# Altium PCB LUMOS.PcbDoc
Units mm, origin at the board's own origin, x right, y up, seen from the top; angles counter-clockwise.
Board outline 88.34 x 68.79 mm, 2 copper layers (Top Layer, Bottom Layer); 52 components, 60 nets, 204 pads, 27 vias.
Unrouted connection lines stored in the file: 2.
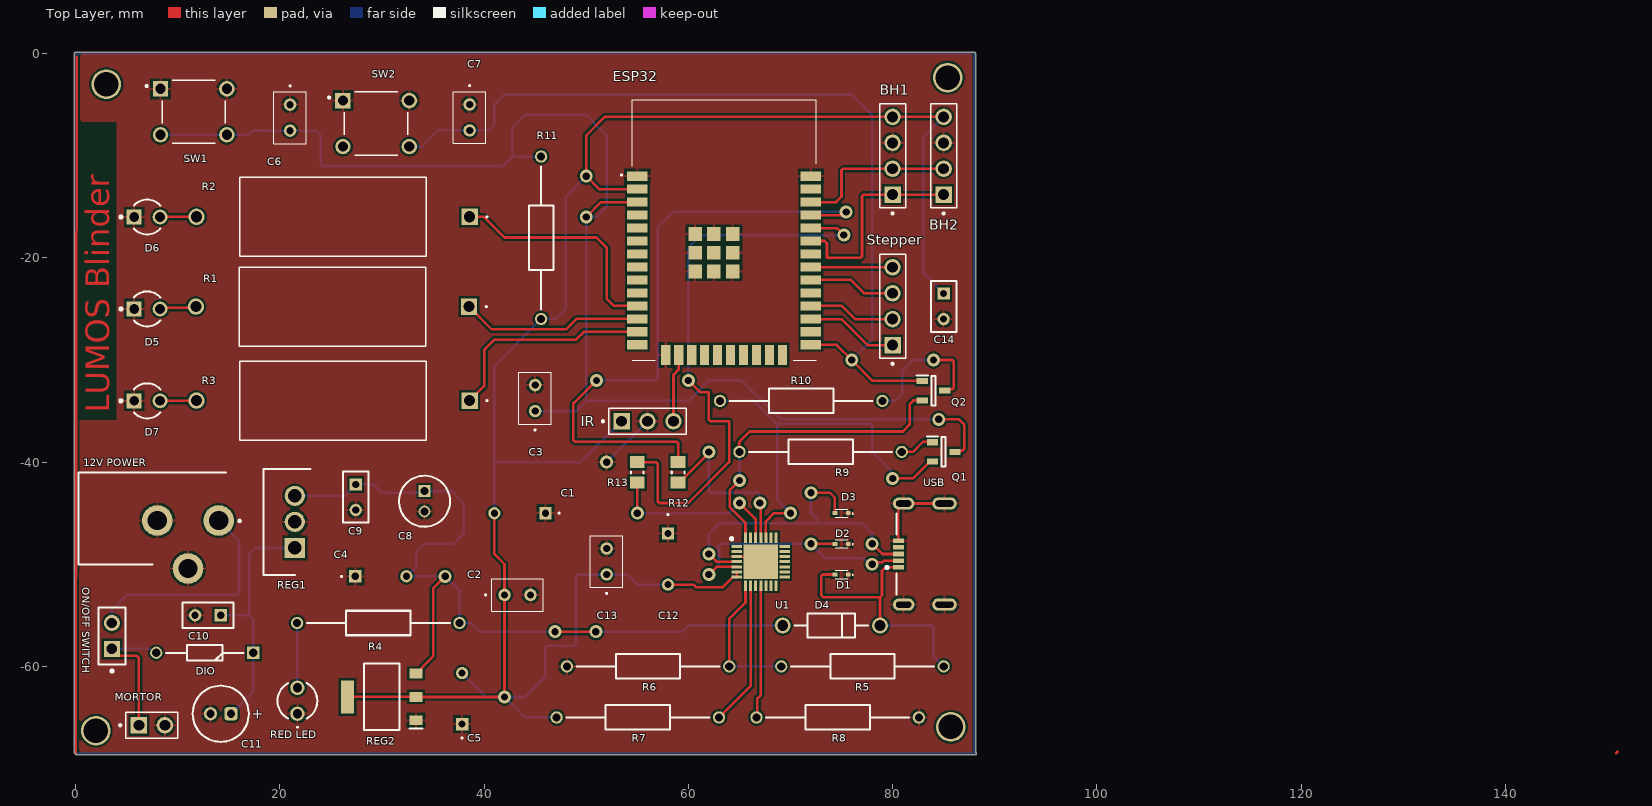
[diagram p0: Top Layer view]
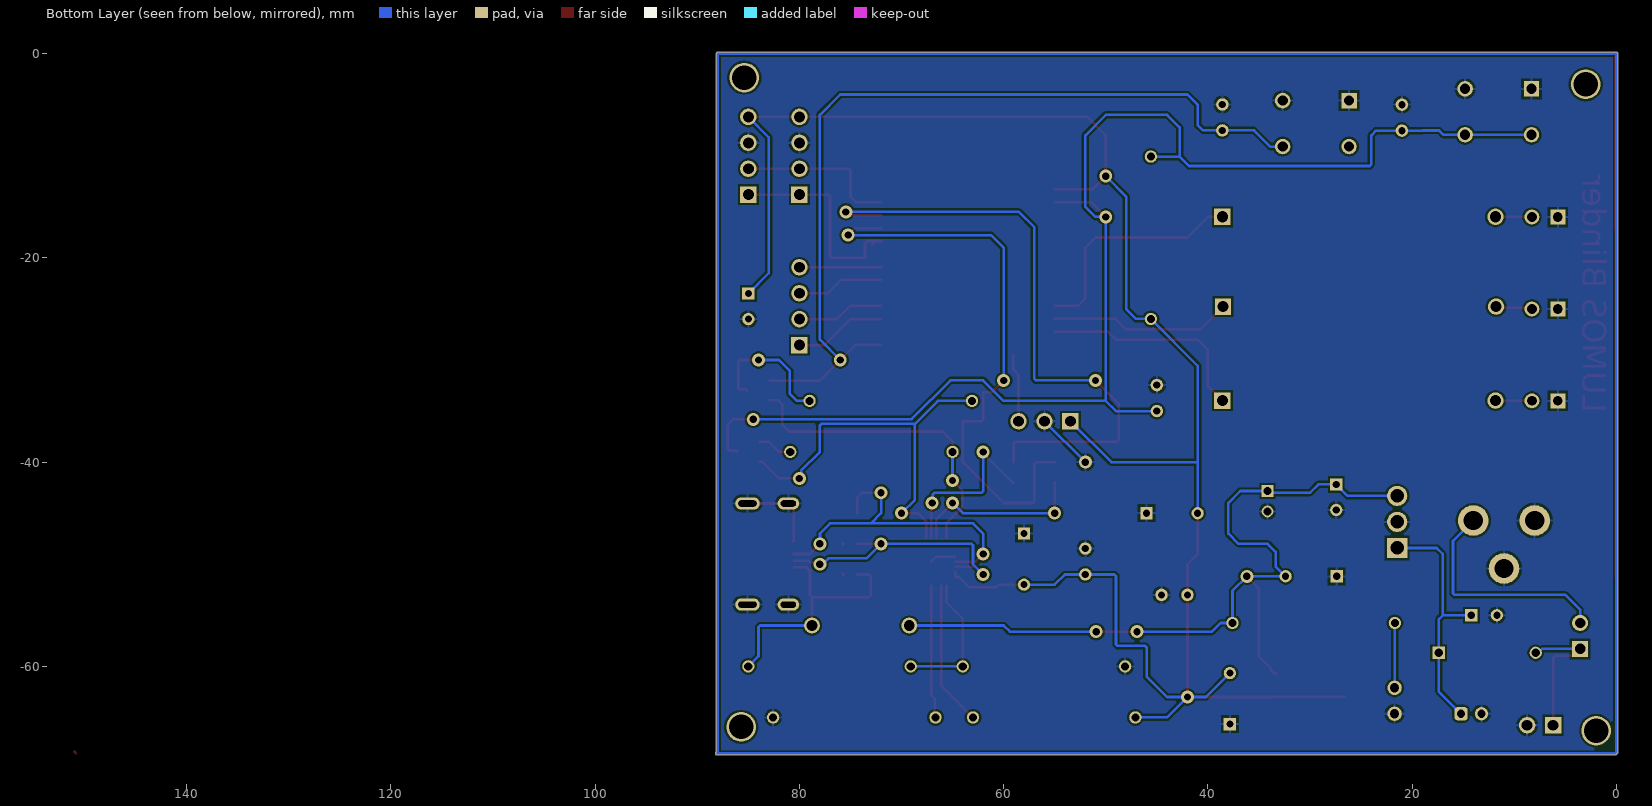
[diagram p1: Bottom Layer view, seen from below]
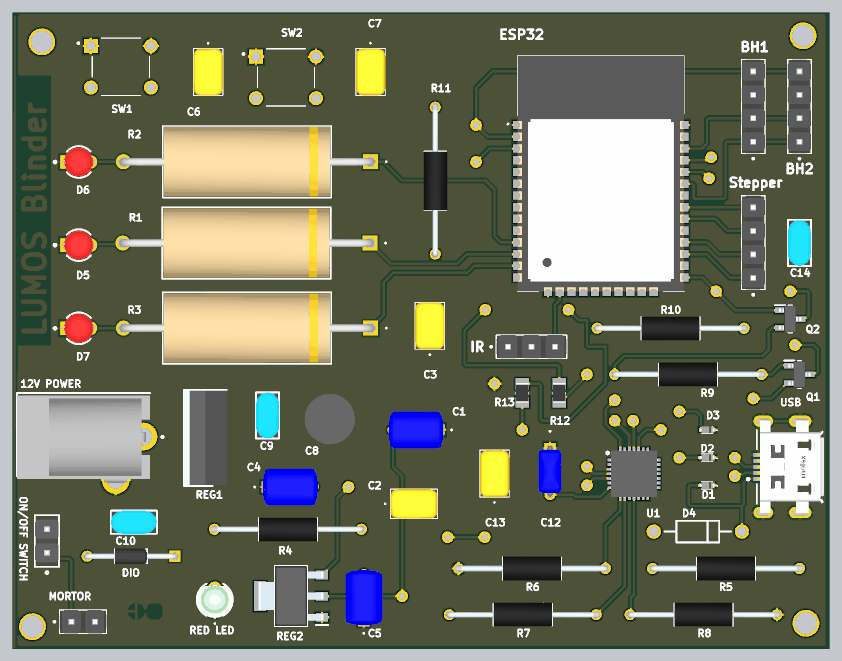
[diagram p2: 3D render of the assembled board from above, using the file's embedded part models]

## Layer stack, top to bottom
Top Solder: solder mask 0.0102, Solder Resist, Dk 3.5
Top Layer: signal copper 0.0356
Dielectric 1: dielectric 0.32, FR-4, Dk 4.8
Bottom Layer: signal copper 0.0356
Bottom Solder: solder mask 0.0102, Solder Resist, Dk 3.5

## Board outline
-0.022,-68.559 cw(c0,-68.433) -0.127,-68.433 -0.127,0 cw(c0,0) 0,0.127 88,0.127 cw(c88,0) 88.127,0 88.127,-68.416 cw(c88.084,-68.536) 88.211,-68.536 cw(c88.084,-68.536) 88.084,-68.664 0.103,-68.664 cw(c0.103,-68.536)

## Design rules (kind name [scope] priority, off if disabled: settings)
Clearance [All] p1: gap=0.203 ignorepadtopadclearanceinfootprint=TRUE
PolygonConnect [All] p1: connectstyle=Relief reliefconductorwidth=0.254 reliefentries=4 polygonreliefangle="90 Angle" airgapwidth=0.254
RoutingVias [All] p1: holewidth=0.711 width=1.27 viastyle="Through Hole" minholewidth=0.711 minwidth=1.27 maxholewidth=0.711 maxwidth=1.27
SolderMaskExpansion [All] p1: expansion=0.102 istentingtop=FALSE
SupplyNets "Schematic Supply Nets_3" [InNet('GND')] p1: voltage=0.000
SupplyNets "Schematic Supply Nets_2" [InNet('EXT_5V')] p2: voltage=0.000
SupplyNets "Schematic Supply Nets_1" [InNet('VDD33')] p3: voltage=0.000
SupplyNets "Schematic Supply Nets" [InNet('VBUS')] p4: voltage=0.000
Width [All] p1: maxlimit=0.254 minlimit=0.254 preferedwidth=0.254
30 further rules are at their usual default settings.

## Components (designator, comment, footprint, x,y, rotation, side; value= is the part's Value field where it differs from the comment)
"12V POWER" "JACK" PJ-102AH 11.001,-50.02 r90 top
BH1 "M20-9990446" HARWIN_M20-9990446 80,-10 r90 top
BH2 "M20-9990446" HARWIN_M20-9990446 85,-10 r90 top
C1 "22uF/10V(20%)" FK20 46,-45 r180 top
C2 "0.1uF/50V(10%)" C320C104K5R5TA 42,-53 r0 top
C3 "0.1uF/50V(10%)" C320C104K5R5TA 45,-35 r90 top
C4 "22uF/10V(20%)" FK20 27.385,-51.181 r0 top
C5 "22uF/10V(20%)" FK20 37.846,-65.659 r90 top
C6 "0.1uF/50V(10%)" C320C104K5R5TA 21,-5 r270 top
C7 "0.1uF/50V(10%)" C320C104K5R5TA 38.583,-4.98 r270 top
C8 "10uF" CAPPRD200W55D500H1250 34.163,-42.831 r270 top
C9 "0.1uF" FP-RDE0P1-MFG 27.432,-43.434 r270 top value=100nF
C10 "0.1uF" FP-RDE0P1-MFG 12.954,-54.991 r180 top value=100nF
C11 "0.22uF" WCAP-ATG8_D5H11 1284.208,1205.357 r0 top value=220nF
C12 "10uF/10v(20%)" FK24 58,-47 r270 top
C13 "0.1uF/50V(10%)" C320C104K5R5TA 52,-51 r90 top
C14 "0.1uF" FP-RDE0P1-MFG 85,-24.75 r270 top value=100nF
D1 "LESD5D5.0CT1G" LESD5D50CT1G 75,-51 r180 top
D2 "LESD5D5.0CT1G" LESD5D50CT1G 75,-48 r180 top
D3 "LESD5D5.0CT1G" LESD5D50CT1G 75,-45 r180 top
D4 "1N5819" ONSC-AXIAL_LEAD-2-59-10_P 74,-56 r180 top
D5 "Power LED" FP-HLMP-1301-MFG 7,-25 r0 top
D6 "Sleep Mode" FP-HLMP-1301-MFG 7,-16 r0 top
D7 "sensoring" FP-HLMP-1301-MFG 7,-34 r0 top
DIO "SD103A-TR" DIOAD950W60L350D150 17.399,-58.674 r180 top
ESP32 "ESP32-WROOM-32__16MB_" ESP32WROOM3216MB 63.5,-17.26 r0 top (schematic designator IC)
IR "M20-9990346" HARWIN_M20-9990346 56,-36 r0 top
MORTOR "M20-9990246" HARWIN_M20-9990246 7.465,-65.766 r0 top (schematic designator "MORTOR POWER")
"ON/OFF SWITCH" "M20-9990246" FP-M20-9990246-MFG 3.556,-57.023 r90 top
Q1 "SS8050-G" SOT95P240X115-3N 85,-39 r0 top
Q2 "SS8050-G" SOT95P240X115-3N 84,-33 r0 top
R1 "330ohm" RES_AC05_VIS 38.521,-24.775 r180 top value=330Ω
R2 "330ohm" RES_AC05_VIS 38.583,-15.98 r180 top value=330Ω
R3 "330ohm" RES_AC05_VIS 38.583,-33.98 r180 top value=330Ω
R4 "2k(5%)" RESAD1590W60L630D240 21.692,-55.753 r0 top
R5 "22.1K(1%)" RESAD1590W60L630D240 85,-60 r180 top
R6 "47.5K(1%)" RESAD1590W60L630D240 48.1,-60 r0 top
R7 "2k(5%)" RESAD1590W60L630D240 63,-65 r180 top
R8 "10k(5%)(NC)" RESAD1590W60L630D240 82.572,-65 r180 top
R9 "10k(5%)" RESAD1590W60L630D240 80.9,-39 r180 top
R10 "10k(5%)" RESAD1590W60L630D240 79,-34 r180 top
R11 "10k(5%)" RESAD1590W60L630D240 45.583,-10.08 r270 top
R12 "0r(5%)" RESC2013X60X35ML10T20 59,-41 r270 top value=0mOhm
R13 "0r(5%)" RESC2013X60X35ML10T20 55,-41 r270 top value=0mOhm
"RED LED" "151031SS06000" 151034GS03000 21.717,-63.373 r90 top
REG1 "L7805CV" TO255P460X1020X2008-3P 21.463,-48.407 r90 top
REG2 "AMS1117-3.3" SOT229P700X180-4N 29.972,-62.992 r180 top
Stepper "M20-9990446" HARWIN_M20-9990446 80,-24.73 r90 top
SW1 "222ADVBA" SW_222ADVBA 11.559,-5.696 r0 top
SW2 "222ADVBA" SW_222ADVBA 29.425,-6.85 r0 top
U1 "CP2102N-A02-GQFN28" QFN50P500X500X80-29N-D 67.091,-49.75 r0 top
USB "47642-0001" FP-47642-0001-MFG 84,-49 r90 top

## Footprints (in the part's own frame and the unit in brackets; to place one, negate y for a bottom-side part, rotate by r counter-clockwise, add the part's x,y. Pads: shape width x height; smd on the part's side, far side on the other; paste and mask are expansions set on the pad)
151034GS03000 [mm]
  round 1.41 hole 0.91: 1(-1.27,0) 2(1.27,0)
  silkscreen extent -2.63,-1.95 1.73,1.95, body extent -1.96,-1.97 1.65,1.98, height 11.14
C320C104K5R5TA [mm]
  round 1.217 hole 0.71: 1(0,0) 2(2.54,0)
  silkscreen extent -1.9,-1.59 3.81,1.59, body extent -1.27,-1.6 3.81,1.59, height 7.36
CAPPRD200W55D500H1250 [mm]
  rect 1.15x1.15 hole 0.75: 1(0,0)
  round 1.15 hole 0.75: 2(2,0)
  silkscreen extent -1.5,-2.5 3.5,2.5, body extent -1.74,-2.75 3.75,2.75, height 12.5
DIOAD950W60L350D150 [mm]
  rect 1.2x1.2 hole 0.8: 1(0,0)
  round 1.2 hole 0.8: 2(9.5,0)
  silkscreen extent 0.95,-0.75 8.55,0.75, body extent -0.3,-0.84 9.8,0.84, height 1.7
ESP32WROOM3216MB [mm]
  rect 2x0.9 smd: 1(-8.5,5.26) 2(-8.5,3.99) 3(-8.5,2.72) 4(-8.5,1.45) 5(-8.5,0.18) 6(-8.5,-1.09) 7(-8.5,-2.36) 8(-8.5,-3.63) 9(-8.5,-4.9) 10(-8.5,-6.17) 11(-8.5,-7.44) 12(-8.5,-8.71) 13(-8.5,-9.98) 14(-8.5,-11.25) 25(8.5,-11.25) 26(8.5,-9.98) 27(8.5,-8.71) 28(8.5,-7.44) 29(8.5,-6.17) 30(8.5,-4.9) 31(8.5,-3.63) 32(8.5,-2.36) 33(8.5,-1.09) 34(8.5,0.18) 35(8.5,1.45) 36(8.5,2.72) 37(8.5,3.99) 38(8.5,5.26)
  rect 0.9x2 smd: 15(-5.715,-12.25) 16(-4.445,-12.25) 17(-3.175,-12.25) 18(-1.905,-12.25) 19(-0.635,-12.25) 20(0.635,-12.25) 21(1.905,-12.25) 22(3.175,-12.25) 23(4.445,-12.25) 24(5.715,-12.25)
  rect 1.33x1.33 smd: 39(-2.835,-0.405) 40(-1,-0.405) 41(0.835,-0.405) 42(-2.835,-2.24) 43(-1,-2.24) 44(0.835,-2.24) 45(-2.835,-4.075) 46(-1,-4.075) 47(0.835,-4.075)
  silkscreen extent -10.1,-12.75 9,12.75, body extent -9,-12.75 9,12.75, height 3.1
FK20 [mm]
  rect 1.2x1.2 hole 0.7: 1(0,0)
  round 1.2 hole 0.7: 2(5,0)
  silkscreen extent -1.4,-0.05 -1.3,0.05, body extent -0.5,-2 5.5,2, height 7.32
FK24 [mm]
  rect 1.2x1.2 hole 0.7: 1(0,0)
  round 1.2 hole 0.7: 2(5,0)
  silkscreen extent -1.9,-0.05 -1.8,0.05, body extent -0.28,-1.25 5.22,1.25, height 5.95
FP-47642-0001-MFG [mm]
  rect 0.45x1.1 smd paste+0 mask+0: 1(-1.3,3.435) 2(-0.65,3.435) 3(0,3.435) 4(0.65,3.435) 5(1.3,3.435)
  rrect100% 1.2x2.1 hole 1.5 slot 0.6 at 0 deg paste-2539.97 mask+0: 6(-4.95,2.915) 7(4.95,2.915)
  rrect100% 1.2x2.4 hole 1.8 slot 0.6 at 0 deg paste-2539.97 mask+0: 8(-4.95,-1.085) 9(4.95,-1.085)
  silkscreen extent -3.98,3.63 3.98,4.68, body extent -5.65,-3.73 5.65,4.09, height 0.25
FP-HLMP-1301-MFG [mm]
  rect 1.45x1.45 hole 0.95 paste-2539.97 mask+0: 1(-1.27,0)
  round 1.45 hole 0.95 paste-2539.97 mask+0: 2(1.27,0)
  silkscreen extent -2.7,-1.71 1.3,1.71, body extent -2.22,-2.22 2.22,2.22, height 0.25
FP-M20-9990246-MFG [mm]
  rect 1.57x1.57 hole 1.02 paste-2539.97 mask+0: 1(-1.27,0)
  round 1.57 hole 1.02 paste-2539.97 mask+0: 2(1.27,0)
  silkscreen extent -3.55,-1.32 2.79,1.32, body extent -2.89,-1.42 2.89,1.42, height 0.25
FP-RDE0P1-MFG [mm]
  rect 1.2x1.2 hole 0.7 paste-2539.97 mask+0: 1(-1.25,0)
  round 1.2 hole 0.7 paste-2539.97 mask+0: 2(1.25,0)
  silkscreen extent -2.5,-1.25 2.5,1.25, body extent -2.6,-1.35 2.6,1.35, height 0.25
HARWIN_M20-9990246 [mm]
  rect 1.605x1.605 / inner round 1.605 / far side rect 1.605x1.605 hole 1.07: 1(-1.27,0)
  round 1.605 hole 1.07: 2(1.27,0)
  silkscreen extent -3.2,-1.27 2.54,1.27, body extent -2.54,-1.27 2.54,1.27, height 8.74
HARWIN_M20-9990346 [mm]
  rect 1.605x1.605 / inner round 1.605 / far side rect 1.605x1.605 hole 1.07: 1(-2.54,0)
  round 1.605 hole 1.07: 2(0,0) 3(2.54,0)
  silkscreen extent -4.47,-1.27 3.81,1.27, body extent -3.81,-1.27 3.81,1.27, height 8.74
HARWIN_M20-9990446 [mm]
  rect 1.605x1.605 / inner round 1.605 / far side rect 1.605x1.605 hole 1.07: 1(-3.81,0)
  round 1.605 hole 1.07: 2(-1.27,0) 3(1.27,0) 4(3.81,0)
  silkscreen extent -5.74,-1.27 5.08,1.27, body extent -5.08,-1.27 5.08,1.27, height 8.74
LESD5D50CT1G [mm]
  rect 0.48x0.4 smd: 1(-0.66,0) 2(0.66,0)
  silkscreen extent -1.15,-0.4 0.6,0.4, body extent -0.8,-0.4 0.8,0.4, height 0.6
ONSC-AXIAL_LEAD-2-59-10_P [mm] "AXIAL, 2-Leads, Diameter 2.35mm"
  round 1.55 hole 1.05: 1(-4.77,0) 2(4.77,0)
  silkscreen extent -3.59,-1.17 3.59,1.17
PJ-102AH [mm]
  round 3 hole 1.9: 1(4.3,-3) 2(4.3,3) 3(-0.4,0)
  silkscreen extent 0,-5.17 9,10.7, body extent -0.68,-3.7 8.72,10.7, height 11.04
QFN50P500X500X80-29N-D [mm]
  rect 1x0.3 smd: 1(-2.35,1.5) 2(-2.35,1) 3(-2.35,0.5) 4(-2.35,0) 5(-2.35,-0.5) 6(-2.35,-1) 7(-2.35,-1.5) 15(2.35,-1.5) 16(2.35,-1) 17(2.35,-0.5) 18(2.35,0) 19(2.35,0.5) 20(2.35,1) 21(2.35,1.5)
  rect 0.3x1 smd: 8(-1.5,-2.35) 9(-1,-2.35) 10(-0.5,-2.35) 11(0,-2.35) 12(0.5,-2.35) 13(1,-2.35) 14(1.5,-2.35) 22(1.5,2.35) 23(1,2.35) 24(0.5,2.35) 25(0,2.35) 26(-0.5,2.35) 27(-1,2.35) 28(-1.5,2.35)
  rect 3.35x3.35 smd: 29(0,0)
  silkscreen extent -2.97,2.13 -2.72,2.37, body extent -2.55,-2.55 2.55,2.55, height 0.8
RES_AC05_VIS [mil]
  rect 63x63 / inner round 60 / far side rect 63x63 hole 43 paste-99999 mask+0: 1(0,0)
  round 63 / inner round 60 / far side round 63 hole 43 paste-99999 mask+0: 2(1053,0)
  silkscreen extent -70,-152 886,153, body extent -16,-147 1069,147, height 295
RESAD1590W60L630D240 [mm]
  round 1.2 hole 0.8: 1(0,0) 2(15.9,0)
  silkscreen extent 0.95,-1.2 14.95,1.2, body extent -0.3,-1.29 16.2,1.29, height 2.6
RESC2013X60X35ML10T20 [mm] "Chip Resistor, 2-Leads, Body 2.1x1.35mm, IPC Low Density"
  rect 1.2x1.45 smd: 1(-1,0) 2(1,0)
  silkscreen extent -0.1,-0.63 0.1,0.63, body extent -1.05,-0.68 1.05,0.67, height 0.6
SOT95P240X115-3N [mm]
  rect 1.1x0.6 smd: 1(-1.1,0.95) 2(-1.1,-0.95) 3(1.1,0)
  silkscreen extent -1.65,-1.45 0.2,1.5, body extent -1.2,-1.45 1.2,1.45, height 1.15
SOT229P700X180-4N [mm]
  rect 1.3x0.95 smd: 1(-3.35,2.29) 2(-3.35,0) 3(-3.35,-2.29)
  rect 1.3x3.25 smd: 4(3.35,0)
  silkscreen extent -4,-3.25 1.75,3.25, body extent -3.5,-3.25 3.5,3.25, height 1.8
SW_222ADVBA [mm]
  rect 1.508x1.508 hole 1: 1(-3.25,2.25)
  round 1.508 hole 1: 2(-3.25,-2.25) 3(3.25,2.25) 4(3.25,-2.25)
  silkscreen extent -4.7,-3.1 3.1,3.1
TO255P460X1020X2008-3P [mm]
  rect 1.98x1.98 hole 1.32: 1(0,0)
  round 1.98 hole 1.32: 2(2.55,0) 3(5.1,0)
  silkscreen extent -2.65,-1.53 7.75,3.07, body extent -2.55,-1.53 7.65,3.07, height 20.08
WCAP-ATG8_D5H11 [mm] "Aluminum Electrolytic Capacitors, 5x11mm"
  rrect50% 1.3x1.3 hole 0.8: 1(-1269,-1270)
  round 1.3 hole 0.8: 2(-1271,-1270)
  silkscreen extent -1272.75,-1272.75 -1267.25,-1267.25, body extent -1272.49,-1272.5 -1267.5,-1267.5, height 11.31

## Part data
"12V POWER": library part PJ-102A, "Connector", Manufacturer_Name="Same Sky", Mouser Part Number=490-PJ-102A, Arrow Part Number=PJ-102A, Arrow Price/Stock=https://www.arrow.com/en/products/pj-102a/cui-devices?utm_currency=USD&region=nac, Datasheet Link=https://www.sameskydevices.com/product/resource/supplyframepdf/pj-102a.pdf, Manufacturer_Part_Number=PJ-102A, Mouser Price/Stock=https://www.mouser.co.uk/ProductDetail/Same-Sky/PJ-102A?qs=WyjlAZoYn50UKjtnxOz%252Bqg%3D%3D
BH1 BH2 Stepper: Package=None, Availability=Unavailable, MF=Harwin, MP=M20-9990446, Price=None
C1 C4 C5: library part FK20X7R1A226MR000, "Capacitor", Manufacturer_Name=TDK, Mouser Part Number=N/A, Datasheet Link=https://product.tdk.com/system/files/dam/doc/product/capacitor/ceramic/lead-mlcc/catalog/leadmlcc_conventional_fk_en.pdf, Height=7mm, Manufacturer_Part_Number=FK20X7R1A226MR000, Mouser Price/Stock=https://www.mouser.co.uk/ProductDetail/TDK/FK20X7R1A226MR000?qs=Ii670aiJhr4gDy7w7zqgKQ%3D%3D
C2 C3 C6 C7 C13: library part C320C104K5R5TA, "Capacitor", Manufacturer_Name=KEMET, Mouser Part Number=80-C320C104K5R, Arrow Part Number=C320C104K5R5TA, Arrow Price/Stock=https://www.arrow.com/en/products/c320c104k5r5ta/kemet-corporation?utm_currency=USD&region=nac, Datasheet Link=https://content.kemet.com/datasheets/KEM_C1050_GOLDMAX_X7R.pdf, Height=5.84mm, Manufacturer_Part_Number=C320C104K5R5TA, Mouser Price/Stock=https://www.mouser.co.uk/ProductDetail/KEMET/C320C104K5R5TA?qs=PmkNt%2FFLxQc4kNUCHU6a6Q%3D%3D
C8: library part EEU-FR1H100, "Capacitor Polarised,EEU-FR1H100", Manufacturer_Name=Panasonic, Mouser Part Number=667-EEU-FR1H100, Datasheet Link=http://industrial.panasonic.com/cdbs/www-data/pdf/RDF0000/ABA0000C1259.pdf, Height=12.5mm, Manufacturer_Part_Number=EEU-FR1H100, Mouser Price/Stock=https://www.mouser.co.uk/ProductDetail/Panasonic/EEU-FR1H100?qs=tfZGHB2PWd1NAbdNSgjToQ%3D%3D
C9 C10 C14: library part CMP-06035-036375-1, "Ceramic Capacitor 100nF ±10% 25V X7R Radial,RDER71E104K0P1H03B", Capacitance=100nF, Case/Package=Radial, Dielectric=X7R, Max Operating Temperature=125°C, Min Operating Temperature=-55°C, Package Quantity=500, Resistor Type=Ceramic, Tolerance=10%, Voltage Rating=25V, Height=3.5mm, Height - Seated (Max)=0.236inch, Lead Diameter=0.5mm, Lead Free="Lead Free", Lead Pitch=0.098inch, Length=0.197inch, Mount="Through Hole", Packaging=Bulk, Termination=Radial, Voltage Rating (DC)=25V, Width=0.098inch
C11: library part CMP-03913-54007281-1, "860010772002 WCAP-ATG8 Aluminum Electrolytic Capacitors", Capacitance=220nF, Case/Package=Radial, Leakage Current=3µA, Max Operating Temperature=85°C, Min Operating Temperature=-40°C, Ripple Current=4mA, Tolerance=20%, Voltage Rating=63V, Diameter=5mm, Dissipation Factor=9%, Height=11mm, Height - Seated (Max)=12.4968mm, Lead Pitch=2.0066mm, Length=11mm, Life (Hours)=2000hours, Mount="Through Hole", NexarPartId=54007281, Packaging="Tape & Box (TB)", Pitch=2mm, Polarity=Polar, REACH SVHC=Unknown, RoHS=Compliant, Voltage Rating (DC)=63V
C12: library part FK24X5R1A106KR000, "Capacitor", Manufacturer_Name=TDK, Datasheet Link=https://product.tdk.com/system/files/dam/doc/product/capacitor/ceramic/lead-mlcc/catalog/leadmlcc_conventional_fk_en.pdf, Height=5.5mm, Manufacturer_Part_Number=FK24X5R1A106KR000
D1 D2 D3: "TVS Diode (Bi-directional)", Manufacturer_Name=LRC, Height=0.7mm, Manufacturer_Part_Number=LESD5D5.0CT1G
D4: library part CMP-1055-00042-1, "Rectifier, 2-Pin Axial_Lead, Pb-Free, Bulk Bag", Manufacturer="On Semiconductor", ComponentLink1Description="Manufacturer URL", ComponentLink1URL=http://www.onsemi.com/, ComponentLink2Description=Datasheet, ComponentLink2URL=http://www.onsemi.cn/pub_link/Collateral/1N5817-D.PDF, ComponentLink3Description="Package Specification", ComponentLink3URL=http://www.onsemi.cn/pub_link/Collateral/59-10.PDF, Configuration=Single, DatasheetVersion="Rev. 10", IFSM Max (A)=25, Mounting Technology="Through Hole", Note1=0, PackageDescription="2-Pin, Axial Lead, Diameter 2.35 mm", PackageReference=AXIAL_LEAD-2-59-10, PackageVersion="Rev. U, 02/2005", Packing="Bulk Bag", PartNumber=1N5819, RoHS=TRUE
D5 D6 D7: library part CMP-18399-000007-1, "LED RED DIFFUSED T-1 T/H", Colour=Red, Forward Current=10mA, Forward Voltage=1.9V, Manufacturer=Broadcom, Manufacturer Part Number=HLMP-1301, Max Junction Temp=+110°C, Package=0, Reverse Voltage=5V, Temperature="-40°C to +100°C", Temperature Range High=+100°C, Temperature Range Low=-40°C, Automotive=No, Category=Diode, ComponentLink2Description=Datasheet, ComponentLink2URL=https://docs.broadcom.com/docs/AV02-1555EN, Device Class L1=Optoelectronics, Device Class L2=LEDs, Device Class L3=unset, Digikey Description="LED RED DIFFUSED T-1 T/H", Lead Free=Yes, Led Orientation=Straight, Luminous Intensity=3.4mcd, Mouser Description="Standard LEDs - Through Hole Red Diffused 635nm 3.4mcd", Octopart=https://octopart.com/hlmp-1301-broadcom-71130345, Peak Emmision Wavelength=635nm, RoHS=TRUE, Viewing Angle=60°, Wavelength=626nm
DIO: "Schottky Diode", Manufacturer_Name=Vishay, Mouser Part Number=625-SD103A, Arrow Part Number=SD103A-TR, Arrow Price/Stock=https://www.arrow.com/en/products/sd103a-tr/vishay?utm_currency=USD&region=nac, Datasheet Link=https://componentsearchengine.com/Datasheets/5/SD103A-TR.pdf, Manufacturer_Part_Number=SD103A-TR, Mouser Price/Stock=https://www.mouser.co.uk/ProductDetail/Vishay-Semiconductors/SD103A-TR?qs=RwahMLkpD2urFD%2FzZdGOBw%3D%3D
ESP32: "Integrated Circuit", Manufacturer_Name="Espressif Systems", Manufacturer_Part_Number="ESP32-WROOM-32 (16MB)", Mouser Part Number=356-ESPWROOM3216MB, Datasheet Link=https://www.espressif.com/sites/default/files/documentation/esp32_datasheet_en.pdf, Height=3.2mm, Mouser Price/Stock=https://www.mouser.co.uk/ProductDetail/Espressif-Systems/ESP32-WROOM-32-16MB?qs=w%2Fv1CP2dgqrcPyEPuQvO1A%3D%3D
IR: "2.54mm (0.1) Pitch SIL Vertical Throughboard Pin Header, 6.1mm mating pin height, tin, 3 contacts", Package=None, Check_prices=https://www.snapeda.com/parts/M20-9990346/Harwin/view-part/?ref=eda, MF=Harwin, MP=M20-9990346, SnapEDA_Link=https://www.snapeda.com/parts/M20-9990346/Harwin/view-part/?ref=snap
MORTOR: "2.54mm (0.1) Pitch SIL Vertical Throughboard Pin Header, 6.1mm mating pin height, tin, 2 contacts", Package=None, Check_prices=https://www.snapeda.com/parts/M20-9990246/Harwin/view-part/?ref=eda, MF=Harwin, MP=M20-9990246, SnapEDA_Link=https://www.snapeda.com/parts/M20-9990246/Harwin/view-part/?ref=snap
"ON/OFF SWITCH": library part CMP-15831-000009-1, "CONN HEADER VERT 2POS 2.54MM", Current Rating=3A, Manufacturer=Harwin, Temperature="-40°C to +105°C", Temperature Range High=+105°C, Temperature Range Low=-40°C, Automotive=No, Category=Conn, ComponentLink2Description=Datasheet, ComponentLink2URL=https://cdn.harwin.com/pdfs/M20-999.pdf, Conn Gender=Male, Conn Orientation=Vertical, Contact Material=Tin,Nickel, Device Class L1=Connectors, Device Class L2="Headers and Wire Housings", Device Class L3=unset, Digikey Description="CONN HEADER VERT 2POS 2.54MM", Height=8.99mm, Lead Free=Yes, Manufacturer Part Number=M20-9990246, Mouser Description="2.54mm (0.1\") Pitch SIL Vertical PC Tail Pin Header, 6.1mm mating pin height, tin, 2 contacts", Number Of Contacts=2, Number Of Rows=1, Octopart=https://octopart.com/m20-9990246-harwin-2590635, Package=M20-9990246, Pitch=2.54mm, RoHS=TRUE
Q1 Q2: "Transistor BJT NPN", Manufacturer_Name="Comchip Technology", Mouser Part Number=750-SS8050-G, Arrow Part Number=SS8050-G, Arrow Price/Stock=https://www.arrow.com/en/products/ss8050-g/comchip-technology?region=nac, Datasheet Link=https://datasheet.datasheetarchive.com/originals/distributors/DKDS-12/229454.pdf, Height=1.15mm, Manufacturer_Part_Number=SS8050-G, Mouser Price/Stock=https://www.mouser.co.uk/ProductDetail/Comchip-Technology/SS8050-G?qs=LLUE9lz1YbcHg%252BWLMAtcrQ%3D%3D
R1 R2 R3: library part CMP-00030-39745953-1, "AC05000003300JAC00 VISHAY AC05000003300JAC00 Through Hole Resistor, 330 ohm, Axial Leaded, 5 W, 5%, AC Series", Case/Package=Axial, Max Operating Temperature=275°C, Max Power Dissipation=5W, Min Operating Temperature=-40°C, Resistance=330Ω, Temperature Coefficient=-10ppm/°C, Tolerance=5%, Voltage Rating (DC)=40V, Composition=Wirewound, Contact Plating=Tin, Diameter=7.5mm, Features="Flame Retardant Coating", Lead Diameter=800µm, Lead Free="Lead Free", Length=18mm, Military Standard=Not, NexarPartId=39745953, Number of Pins=2, Number of Terminations=2, Packaging="Cut Tape (CT)", Power Rating=5W, Radiation Hardening=No, REACH SVHC=Unknown, RoHS=Compliant, Schedule B="8533210080, 8533210080", Termination=Axial, Width=7.49mm
R4 R7: library part CFR-25JB-52-2K2, "Resistor", Manufacturer_Name=YAGEO, Mouser Part Number=603-CFR-25JB-52-2K2, Datasheet Link=https://www.mouser.in/datasheet/2/447/YAGEO_CFR_datasheet_2021v0-3002993.pdf, Manufacturer_Part_Number=CFR-25JB-52-2K2, Mouser Price/Stock=https://www.mouser.co.uk/ProductDetail/YAGEO/CFR-25JB-52-2K2?qs=oypCK0zG327VTyS4ZTRfWw%3D%3D
R5: library part MFR-25FRF52-22K1, "Resistor", Manufacturer_Name=KEMET, Mouser Part Number=603-MFR-25FRF5222K1, Datasheet Link=https://www.yageo.com/upload/media/product/productsearch/datasheet/lr/YAGEO%20MFR_datasheet_2021v1.pdf, Manufacturer_Part_Number=MFR-25FRF52-22K1, Mouser Price/Stock=https://www.mouser.co.uk/ProductDetail/YAGEO/MFR-25FRF52-22K1?qs=5furm%2FeQHzR7C102KsI%252BDQ%3D%3D
R6: library part MFR-25FBF52-47K5, "Resistor", Manufacturer_Name=KEMET, Mouser Part Number=603-MFR-25FBF52-47K5, Arrow Part Number=MFR-25FBF52-47K5, Arrow Price/Stock=https://www.arrow.com/en/products/mfr-25fbf52-47k5/yageo, Datasheet Link=https://www.yageo.com/upload/media/product/productsearch/datasheet/lr/YAGEO%20MFR_datasheet_2021v1.pdf, Manufacturer_Part_Number=MFR-25FBF52-47K5, Mouser Price/Stock=https://www.mouser.com/Search/Refine.aspx?Keyword=603-MFR-25FBF52-47K5
R8 R9 R10 R11: library part CFR-25JB-52-10K, "Resistor", Manufacturer_Name=KEMET, Mouser Part Number=603-CFR-25JB-52-10K, Arrow Part Number=CFR-25JB-52-10K, Arrow Price/Stock=https://www.arrow.com/en/products/cfr-25jb-52-10k/yageo, Datasheet Link=https://datasheet.datasheetarchive.com/originals/distributors/Datasheets_SAMA/cf5c7c7b14e59499e9125003e6ee5ce2.pdf, Manufacturer_Part_Number=CFR-25JB-52-10K, Mouser Price/Stock=https://www.mouser.co.uk/ProductDetail/YAGEO/CFR-25JB-52-10K?qs=oypCK0zG32646UD7yHncYg%3D%3D
R12 R13: library part CMP-2100-03673-1, "Chip Resistor, 0 Ohm, Jumper, +/- 5%, 0.125 W, -55 to 155 degC, 0805 (2012 Metric), RoHS, Tape and Reel", Case Code (Imperial)=0805, Case Code (Metric)=2012, Manufacturer=Yageo, Max Operating Temperature=155degC, Min Operating Temperature=-55degC, Package Description="2-Pin Surface Mounted Device, Body 2 x 1.25 mm", Power Rating=125mW, Resistance=0mOhm, Temperature Coefficient=200ppm/degreesC, Tolerance=5%, Voltage Rating=150V, Case/Package=0805, Composition=ThickFilm, Contact Plating=Tin, Datasheet URL=http://www.yageo.com/NewPortal/yageodocoutput?fileName=/pdf/R-Chip/PYu-RC_Group_51_RoHS_L_5.pdf, Datasheet Version="Rev. 5, 10/2016", Depth=1.25mm, Height=0.5mm, Lead Free=LeadFree, Length=2mm, Manufacturer URL=http://www.yageo.com/, Military Standard=Not, Number of Pins=2, Package Reference=0805, Packaging=TapeandReel, Radiation Hardening=No, REACH SVHC=Unknown, RoHSCompliant=true, Termination=SMD/SMT, Voltage Rating (DC)=150V, Width=1.25mm
"RED LED": "LED", Manufacturer_Name="Wurth Elektronik", Mouser Part Number=710-151031SS06000, Datasheet Link=https://katalog.we-online.de/led/datasheet/151031SS06000.pdf, Manufacturer_Part_Number=151031SS06000, Mouser Price/Stock=https://www.mouser.co.uk/ProductDetail/Wurth-Elektronik/151031SS06000?qs=LlUlMxKIyB2I%252BOeI1q4%2Fyg%3D%3D
REG1: "Integrated Circuit", Manufacturer_Name=STMicroelectronics, Mouser Part Number=511-L7805CV, Arrow Part Number=L7805CV, Arrow Price/Stock=https://www.arrow.com/en/products/l7805cv/stmicroelectronics?utm_currency=USD&region=europe, Datasheet Link=http://www.st.com/web/en/resource/technical/document/datasheet/CD00000444.pdf, Height=4.6mm, Manufacturer_Part_Number=L7805CV, Mouser Price/Stock=https://www.mouser.co.uk/ProductDetail/STMicroelectronics/L7805CV?qs=9NrABl3fj%2FqplZAHiYUxWg%3D%3D
REG2: "Integrated Circuit", Manufacturer_Name="Advanced Monolithic Systems", Datasheet Link=http://www.advanced-monolithic.com/pdf/ds1117.pdf, Height=1.8mm, Manufacturer_Part_Number=AMS1117-3.3
SW1 SW2: "Tactile Switch SPST-NO Top Actuated Through Hole", Package=None, Availability=Unavailable, MF="CTS Electrocomponents", MP=222ADVBA, Price=None, SnapEDA_Link=https://www.snapeda.com/parts/222ADVBA/CTS%20Electrocomponents/view-part/3601198/?ref=snap
U1: "Integrated Circuit", Manufacturer_Name="Silicon Labs", Mouser Part Number=634-CP2102NA02GQFN28, Arrow Part Number=CP2102N-A02-GQFN28, Arrow Price/Stock=https://www.arrow.com/en/products/cp2102n-a02-gqfn28/silicon-labs?utm_currency=USD&region=europe, Datasheet Link=https://componentsearchengine.com/Datasheets/2/CP2102N-A02-GQFN28.pdf, Height=0.8mm, Manufacturer_Part_Number=CP2102N-A02-GQFN28, Mouser Price/Stock=https://www.mouser.co.uk/ProductDetail/Silicon-Labs/CP2102N-A02-GQFN28?qs=u16ybLDytRaSBkSkyjYFiA%3D%3D
USB: library part CMP-04767-000010-1, "CONN RCPT MICRO USB B 5POS SMD", Current Rating=1.8A, Max Operating Temperature=85°C, Min Operating Temperature=-30°C, Package Quantity=1500, Voltage Rating=30V, Connector Type=USB, Contact Material="Copper Alloy", Contact Plating=Gold, Gender=Female, Halogen Free="Low Halogen", Housing Material=Polymer, Length=10.2mm, Mount="Surface Mount", Number of Circuits=5, Number Of Contacts=5, Number of Ports=1, Number of Terminals/Pins=5, Orientation="Right Angle", Packaging="Tape and Reel", Pitch=0.65mm, Radiation Hardening=No, RoHS Compliant=Yes, Series=47642, Termination=Solder, USB Standard="USB 2.0", Voltage Rating (AC)=30V

## Free pads (board coordinates)
  round 2.9 hole 2.4: 2(3,-3) 3(1.986,-66.296) 4(85.702,-65.931) 5(85.394,-2.346)

## Via types
v1: diameter 1.27, hole 0.711, Top Layer to Bottom Layer, 27 vias

## Nets (pads, with @x,y where several pads share a name; then routed paths per layer and width w, separated by ;. In a path a pad name is that pad's centre, name@x,y a point inside that pad or via, vN(x,y) a via of type N, cw(c..) or ccw(c..) an arc to the next point about the centre after c; other vN are vias at no path point)
ACTIVE: R8.2 U1.11 | length 13.1
  Top Layer w0.254: R8.2 66.759,-64.914 66.759,-63.138 67.091,-62.805 U1.11
CLK: ESP32.20
CMD: ESP32.19
CTS: U1.23
D+: D3.2 U1.4 USB.3 | length 33.4
  Top Layer w0.254: v1(62,-49) 62.75,-49.75 U1.4 ; v1(72,-43) 73.851,-43 74.34,-43.489 74.34,-44.96 74.3,-45 D3.2 ; v1(78,-48) 79,-49 USB.3
  Bottom Layer w0.254: v1(62,-49) 62,-47 63,-46 73,-46 ; v1(72,-43) 72,-45 73,-46 ; v1(78,-48) 77.984,-47.984 77.984,-46.984 77,-46 73,-46
D-: D2.2 U1.5 USB.2 | length 27.3
  Top Layer w0.254: v1(62,-51) 62.75,-50.25 U1.5 ; v1(72,-48) D2.2 ; v1(78,-50) 78.194,-49.806 78.987,-49.806 79.143,-49.65 USB.2
  Bottom Layer w0.254: v1(62,-51) 63,-50 63,-48.149 63.149,-48 v1(72,-48) 73.417,-49.417 77.146,-49.417 77.729,-50 v1(78,-50)
DCD: U1.1
DSR: U1.27
DTR: Q2.2 R9.2 U1.28 | length 31.2
  Top Layer w0.254: R9.2 65,-38 66,-37 81,-37 81.665,-36.335 81.665,-34.335 82.05,-33.95 Q2.2 ; v1(65.008,-41.796) 64.035,-42.769 64.035,-44.4 65.591,-45.956 U1.28
  Bottom Layer w0.254: R9.2 65.004,-39.004 65.004,-41.792 v1(65.008,-41.796)
EN: C3.1 C6.2 ESP32.3 Q1.3 R11.1 SW1.2 SW1.4 | length 135.8
  Top Layer w0.254: v1(50,-16) 51.46,-14.54 ESP32.3 ; v1(84.519,-35.812) 86.515,-35.812 87,-36.298 87,-38.722 86.851,-38.87 86.23,-38.87 Q1.3
  Bottom Layer w0.254: SW1.2 SW1.4 16.943,-7.946 17.363,-7.527 18.952,-7.527 18.965,-7.54 C6.2 23.54,-7.54 24,-8 24,-10.851 24.149,-11 41.851,-11 42.771,-10.08 ; C3.1 49,-35 50,-34 ; R11.1 42.771,-10.08 ; v1(84.519,-35.812) 84.497,-35.79 69,-35.79 65.21,-32 62,-32 60,-34 50,-34 ; 42.771,-10.08 42.771,-7.229 44,-6 50,-6 52,-8 52,-15 51.016,-15.984 50.016,-15.984 v1(50,-16) 50,-34
EXT_5V: C4.2 C8.1 C9.1 D4.2 R4.2 REG1.3 REG2.3 | length 81.1
  Top Layer w0.254: REG2.3 33.497,-60.702 33.845,-60.354 33.845,-60.179 35,-59.024 35,-52.362 v1(36.181,-51.181) ; v1(46.94,-56.605) v1(50.934,-56.605)
  Bottom Layer w0.254: REG1.3 26.309,-43.307 C9.1 29.184,-42.184 30,-43 33.994,-43 C8.1 36.831,-42.831 38,-44 38,-47 37,-48 34.149,-48 33.357,-48.791 33.357,-50.209 C4.2 v1(36.181,-51.181) 37.592,-52.592 R4.2 38.753,-55.753 39.605,-56.605 v1(46.94,-56.605) ; v1(50.934,-56.605) 59.395,-56.605 60,-56 D4.2
GND: "12V POWER.2" "12V POWER.3" "RED LED.1" BH1.3 BH2.3 C1.1 C2.2 C3.2 C4.1 C5.1 C6.1 C7.1 C8.2 C9.2 C10.2 C11.2 C12.1 C13.2 C14.2 D1.1 D2.1 D3.1 D5.1 D6.1 D7.1 ESP32.1 ESP32.15 ESP32.38 ESP32.39 ESP32.40 ESP32.41 ESP32.42 ESP32.43 ESP32.44 ESP32.45 ESP32.46 ESP32.47 IR.2 MORTOR.2 R6.1 R8.1 REG1.2 REG2.1 SW1.1 SW1.3 SW2.1 SW2.3 U1.3 U1.29 USB.5 USB.6 USB.7 USB.8 USB.9 | length 18.5
  Top Layer w0.254: 8.001,-45.72 8.281,-46 ; MORTOR.2 MORTOR.2@8.969,-65.999 ; C10.2@11.695,-55 C10.2 ; SW2.1@26.015,-4.44 SW2.1 SW2.1@26.155,-4.58 ; C5.1@37.794,-65.711 C5.1 ; C7.1@38.562,-5 C7.1 ; C2.2 C2.2@44.641,-53.101 ; U1.3@64.722,-49.23 U1.3 66.591,-49.25 U1.29 ; D1.1 75.7,-51 D1.1@75.773,-50.927 ; D2.1 D2.1@75.7,-48 ; D2.1@75.773,-48.073 D2.1@75.7,-48 ; D2.1@75.773,-47.927 D2.1@75.7,-48 ; USB.5@80.66,-47.795 USB.5 80.565,-44.487 81.002,-44.05 USB.7 USB.9 ; R8.1 R8.1@82.594,-65 ; BH2.3 BH2.3@85.259,-8.989
  Bottom Layer w0.254: C9.2 C9.2@27.505,-44.758 ; C8.2@34.09,-44.758 C8.2 ; v1(52,-40) IR.2
IO0: C7.2 ESP32.25 Q2.1 SW2.2 SW2.4 | length 86.6
  Top Layer w0.254: ESP32.25 74.51,-28.51 v1(76,-30) 78.05,-32.05 Q2.1
  Bottom Layer w0.254: SW2.4 33.9,-9.1 35.48,-7.52 C7.2 40.48,-7.52 41,-7 41,-5 42,-4 76,-4 78,-6 78,-28 v1(76,-30)
IO2: ESP32.24
IO4: ESP32.26
IO5: ESP32.29
IO12: ESP32.14
IO13: ESP32.16 IR.3 | length 6.7
  Top Layer w0.254: IR.3 58.54,-31.46 59.055,-30.945 ESP32.16
IO14: ESP32.13 R3.1 | length 21.3
  Top Layer w0.254: R3.1 40,-32.562 40,-29 41,-28 49,-28 49.76,-27.24 ESP32.13
IO15: ESP32.23
IO16: ESP32.27 Stepper.1 | length 9.1
  Top Layer w0.254: ESP32.27 72.03,-26 75,-26 77.54,-28.54 Stepper.1
IO17: ESP32.28 Stepper.2 | length 8.5
  Top Layer w0.254: ESP32.28 75.023,-24.7 76.323,-26 Stepper.2
IO18: ESP32.30 Stepper.3 | length 8.6
  Top Layer w0.254: ESP32.30 72.021,-22.139 75.865,-22.139 77.186,-23.46 Stepper.3
IO19: ESP32.31 Stepper.4 | length 8
  Top Layer w0.254: ESP32.31 72.03,-20.92 Stepper.4
IO21: BH1.1 BH2.1 ESP32.33 | length 21.5
  Top Layer w0.254: ESP32.33@72.873,-18.673 72.55,-18.35 ESP32.33 73.356,-18.35 73.575,-18.569 73.575,-19.925 73.65,-20 76.851,-20 77,-19.851 77,-13.959 77.149,-13.81 BH1.1 BH2.1
IO22: BH1.2 BH2.2 ESP32.36 | length 15.9
  Top Layer w0.254: ESP32.36 74.46,-14.54 75,-14 75,-11.419 75.149,-11.27 BH2.2
IO23: ESP32.37
IO25: ESP32.10
IO26: ESP32.11 R2.1 | length 23
  Top Layer w0.254: R2.1 39.98,-15.98 42,-18 51,-18 52,-19 52,-24 52.7,-24.7 ESP32.11
IO27: ESP32.12 R1.1 | length 17.8
  Top Layer w0.254: R1.1 40.746,-27 48,-27 49.03,-25.97 ESP32.12
IO32: ESP32.8
IO33: ESP32.9
IO34: ESP32.6
IO35: ESP32.7
NC: ESP32.32
"Net12V POWER_1": "12V POWER.1" "ON/OFF SWITCH.2" | length 22.4
  Bottom Layer w0.254: 3.556,-55.753 3.556,-54.444 5,-53 15.851,-53 16,-52.851 16,-47.719 14.001,-45.72
NetC10_1: C10.1 C11.1 DIO.1 REG1.1 | length 24.2
  Bottom Layer w0.254: C10.1 14.213,-55 17,-55 ; C11.1 17.399,-62.452 DIO.1 17.399,-55.399 17,-55 ; REG1.1 17.593,-48.407 17,-49 17,-55
NetD5_2: D5.2 R1.2 | length 3.6
  Top Layer w0.254: D5.2 8.383,-24.888 11.662,-24.888 R1.2
  Bottom Layer w0.254: D5.2 D5.2@8.281,-25.011 ; R1.2@11.764,-24.764 R1.2
NetD6_2: D6.2 R2.2 | length 3.6
  Top Layer w0.254: D6.2 8.28,-15.99 11.826,-15.99 R2.2
NetD7_2: D7.2 R3.2 | length 3.6
  Top Layer w0.254: D7.2 8.28,-33.99 11.826,-33.99 R3.2
  Bottom Layer w0.254: D7.2 D7.2@8.286,-34.016 ; R3.2@11.821,-33.964 R3.2
NetDIO_2: "ON/OFF SWITCH.1" DIO.2 MORTOR.1 | length 14.2
  Top Layer w0.254: 3.556,-58.293 4.214,-58.951 5.951,-58.951 6.195,-59.195 MORTOR.1
  Bottom Layer w0.254: 3.556,-58.293 7.262,-58.293 7.643,-58.674 DIO.2 ; MORTOR.1@6.09,-65.66 MORTOR.1
NetQ1_1: Q1.1 R9.1 | length 3.4
  Top Layer w0.254: R9.1 82,-39 83,-38 83.85,-38 Q1.1
NetQ2_3: Q2.3 R10.1 | length 13.6
  Top Layer w0.254: v1(84,-30) 85.851,-30 86,-30.149 86,-32.722 85.851,-32.87 85.23,-32.87 Q2.3
  Bottom Layer w0.254: R10.1 80.242,-34 80.929,-33.313 80.929,-31.071 82,-30 v1(84,-30)
NetR4_1: "RED LED.2" R4.1 | length 6.4
  Bottom Layer w0.254: R4.1 21.705,-55.766 21.705,-62.091 21.717,-62.103
NetR5_2: R5.2 R6.2 U1.8 | length 13.7
  Top Layer w0.254: R6.2 64,-55.354 65.591,-53.762 U1.8
  Bottom Layer w0.254: R6.2 R5.2
NetR7_1: R7.1 U1.9 | length 14.2
  Top Layer w0.254: R7.1 66.091,-61.909 U1.9
RI: U1.2
RTS: Q1.2 R10.2 U1.24 | length 40.1
  Top Layer w0.254: U1.24 67.591,-45.812 68.403,-45 v1(70,-45) ; v1(80.002,-41.597) 82.003,-41.597 83.65,-39.95 Q1.2
  Bottom Layer w0.254: R10.2 66.44,-34 68.687,-36.247 ; v1(70,-45) 68.687,-43.687 68.687,-36.247 ; v1(80.002,-41.597) 79.835,-41.43 79.835,-40.835 78,-39 78,-36.396 77.851,-36.247 68.687,-36.247
RXD: R12.2 U1.25 | length 17.5
  Top Layer w0.254: R12.2 59.125,-42 62,-39.125 v1(62,-39) ; v1(67,-44) 67.072,-44.072 67.072,-47.38 U1.25
  Bottom Layer w0.254: v1(62,-39) 62,-42.851 62.149,-43 66.774,-43 66.922,-43.149 66.922,-43.922 v1(67,-44)
RXD0: ESP32.34 R13.1 | length 58
  Top Layer w0.254: R13.1 56.851,-40 57,-40.149 57,-43.851 57.149,-44 59.988,-44 64,-39.988 64,-36 62.149,-36 62,-35.851 62,-33.149 61.149,-33.149 v1(60,-32) ; ESP32.34 74.534,-17.08 v1(75.222,-17.768)
  Bottom Layer w0.254: v1(60,-32) 60,-19 61.232,-17.768 v1(75.222,-17.768)
SD0: ESP32.21
SD1: ESP32.22
SD2: ESP32.17
SD3: ESP32.18
SENSOR_VN: ESP32.5
SENSOR_VP: ESP32.4
TXD: R13.2 U1.26 | length 17.5
  Top Layer w0.254: v1(55,-45) R13.2 ; v1(65,-44) 66.591,-45.591 U1.26
  Bottom Layer w0.254: v1(55,-45) 64,-45 v1(65,-44)
TXD0: ESP32.35 R12.1 | length 62.6
  Top Layer w0.254: v1(51,-32) 48.744,-34.256 48.744,-37.851 48.893,-38 58.851,-38 59,-38.149 R12.1 ; ESP32.35 75.141,-15.81 v1(75.451,-15.5)
  Bottom Layer w0.254: v1(51,-32) 56.851,-32 57,-31.851 57,-17 58.5,-15.5 v1(75.451,-15.5)
VBUS: D1.2 D4.1 R5.1 USB.1 | length 25.9
  Top Layer w0.254: D1.2 73.149,-51 73,-51.149 73,-53 73.241,-53.241 78.77,-53.241 ; D4.1 78.77,-53.241 ; USB.1 79.311,-50.3 78.965,-50.646 78.965,-53.046 78.77,-53.241
  Bottom Layer w0.254: D4.1 83.851,-56 84,-56.149 84,-59 R5.1
VDD33: BH1.4 BH2.4 C1.2 C2.1 C5.2 C12.2 C13.1 C14.1 ESP32.2 IR.1 R7.2 R11.2 REG2.2 REG2.4 U1.6 U1.7 | length 195.3
  Top Layer w0.254: REG2.4 REG2.2 ; REG2.2@33.497,-63 v1(42,-63) C2.1 42,-50 41,-49 C1.2 ; ESP32.2 51.27,-13.27 v1(50,-12) 50,-8 51.81,-6.19 BH1.4 BH2.4 ; C12.2 60.508,-52 60.752,-52.244 63.397,-52.244 64.391,-51.25 U1.7 U1.6
  Bottom Layer w0.254: C5.2 40.187,-63 v1(42,-63) ; C1.2 41,-40 ; R7.2 44,-65 v1(42,-63) ; v1(50,-12) 48,-14 48,-25 47.02,-25.98 R11.2 41,-30.562 41,-40 ; IR.1 49.46,-40 41,-40 ; C12.2 55,-52 54,-51 C13.1 49.149,-51 49,-51.149 49,-57.851 48.851,-58 46.149,-58 46,-58.149 46,-61 44,-63 v1(42,-63) ; C14.1 83,-21.5 83,-8.19 BH2.4
pads on no net: U1.10 U1.12 U1.13 U1.14 U1.15 U1.16 U1.17 U1.18 U1.19 U1.20 U1.21 U1.22 USB.4
copper on no net: | length 381.5
  Top Layer w0.254: 0.025,-68.475 0.1,-0.3 ; 150.851,-68.5 151,-68.351
  Bottom Layer w0.254: 0,-68.433 0.103,-68.536 88.084,-68.536 88,-68.452 88,0 0,0 0,-68.433

## Polygon pours and split planes (outlines as drawn)
GND on Bottom Layer "GND_L02_P000" (solid, pour order 0): 0,0 0,-68.433 87.981,-68.433 88,-68.452 88,0
GND on Top Layer "GND_L01_P001" (solid, pour order 1): 0,0 0,-68.45 0.025,-68.475 0.098,-68.402 87.798,-68.402 87.798,-0.202 88,0

## Other copper
Top Layer:
  text "LUMOS Blinder" at 3.307,-35.171 h2.29 r90

## Text inside footprints (layer, text, board x,y; h text height)
C11: Top Overlay "+" at 17.258,-65.143 h1